# Altium PCB Brakelight_V2.PcbDoc
Units mm, origin at the board's own origin, x right, y up, seen from the top; angles counter-clockwise.
Board outline 30 x 50 mm, 2 copper layers (Top Layer, Bottom Layer); 30 components, 22 nets, 101 pads, 97 vias.
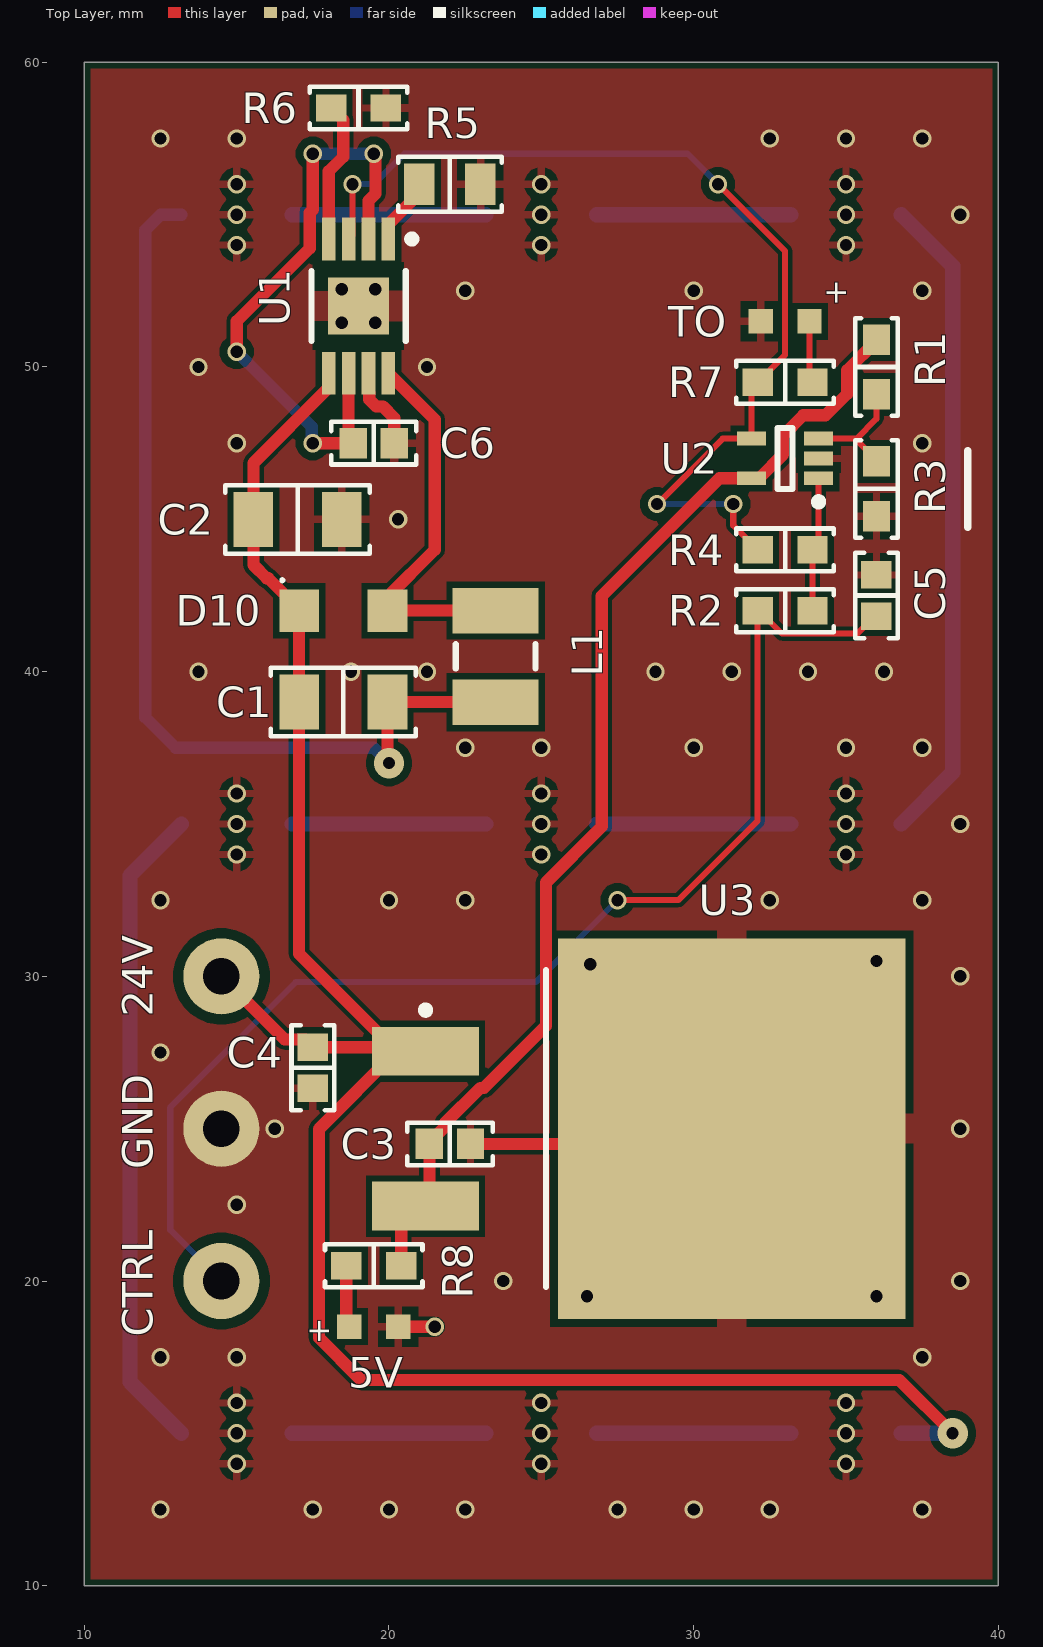
[diagram p0: Top Layer view]
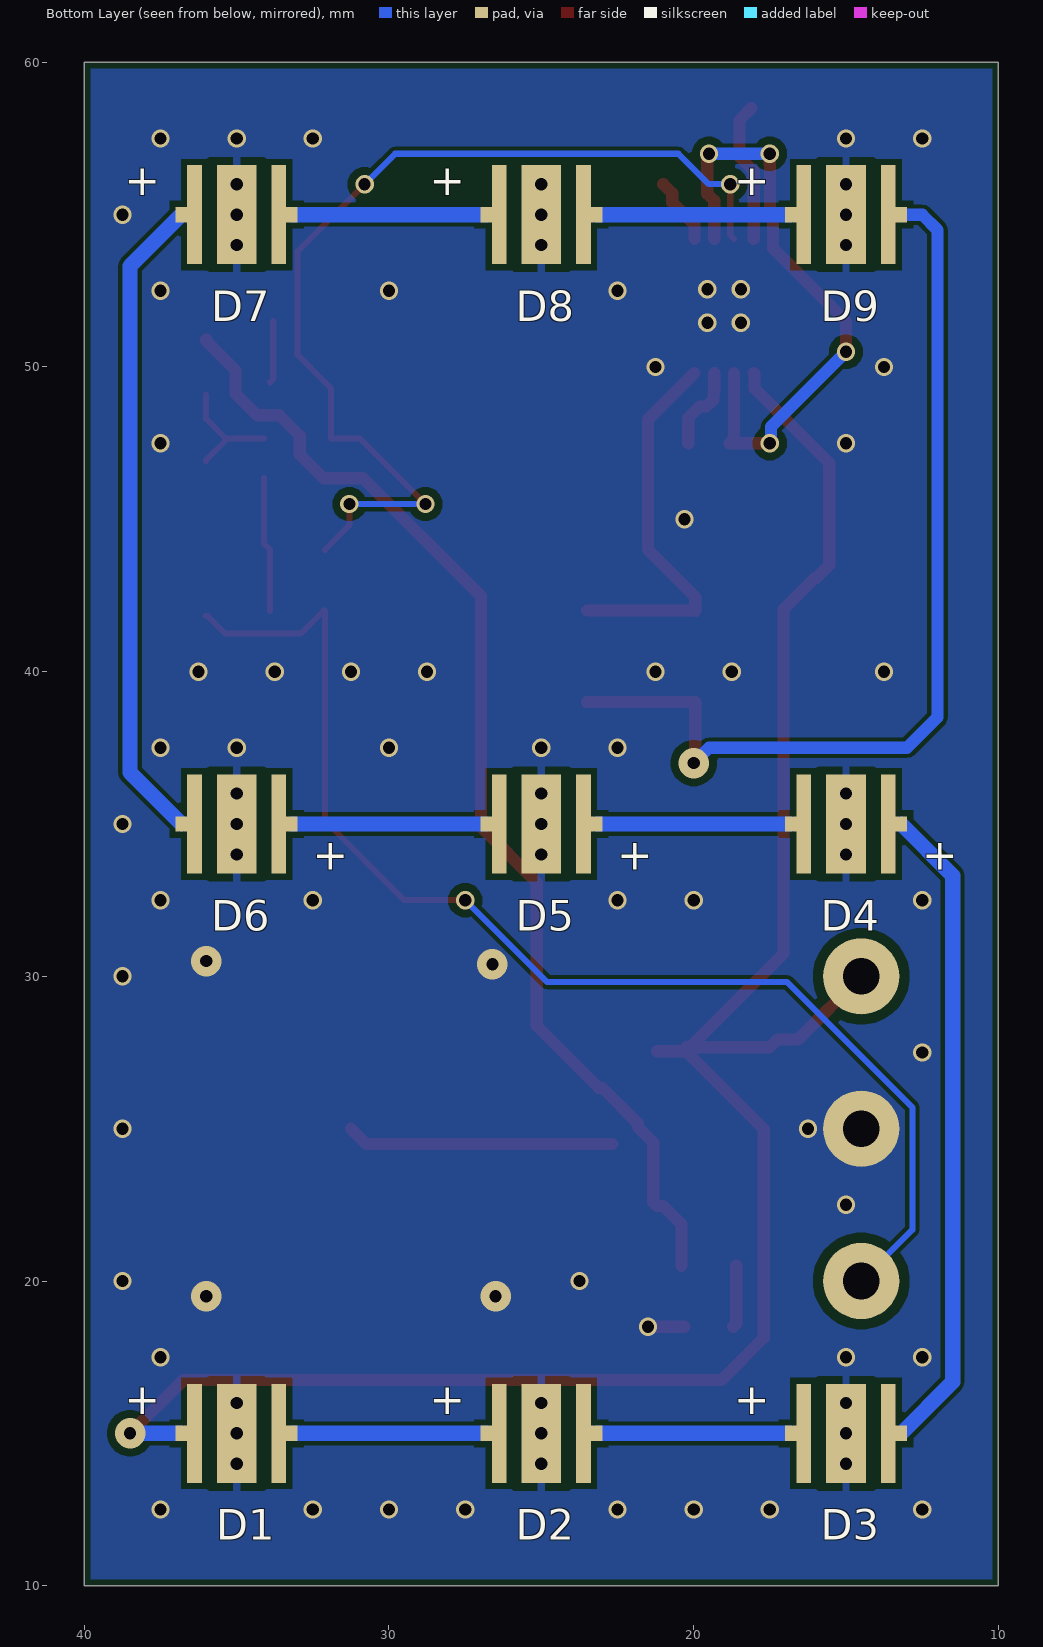
[diagram p1: Bottom Layer view, seen from below]
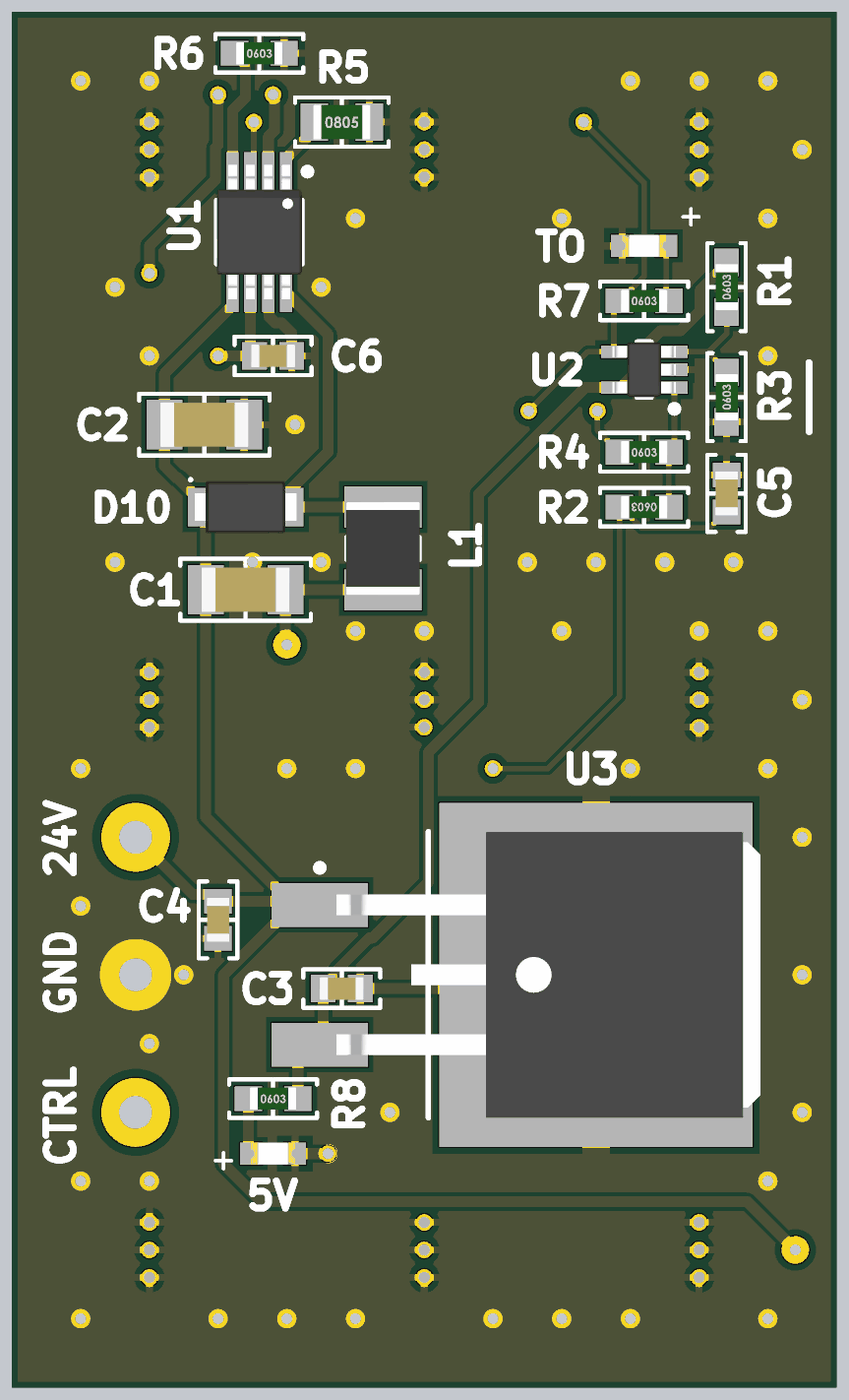
[diagram p2: 3D render of the assembled board from above, using the file's embedded part models]
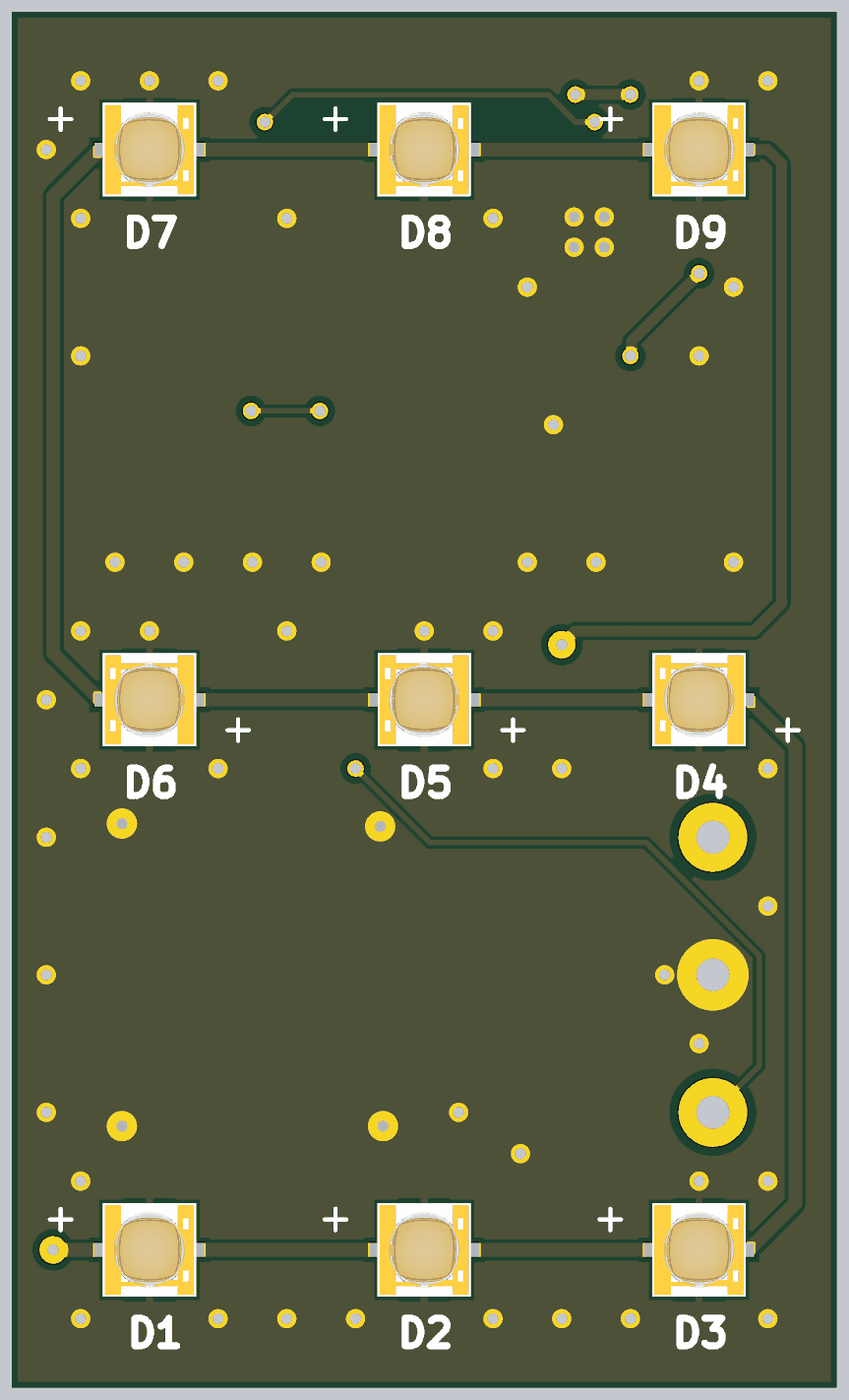
[diagram p3: 3D render of the assembled board from below, using the file's embedded part models]

## Layer stack, top to bottom
Top Solder: solder mask 0.0102, Solder Resist, Dk 3.5
Top Layer: signal copper 0.0356
Dielectric 1: dielectric 0.32, FR-4, Dk 4.8
Bottom Layer: signal copper 0.0356
Bottom Solder: solder mask 0.0102, Solder Resist, Dk 3.5

## Board outline
10,10 40,10 40,60 10,60

## Design rules (kind name [scope] priority, off if disabled: settings)
BoardOutlineClearance [All] p1: gap=0.2 ignorepadtopadclearanceinfootprint=FALSE // Trace to V-cut >0.4mm
Clearance [All] p1: gap=0.254 ignorepadtopadclearanceinfootprint=TRUE except(0: Arc-Hole Track-Hole SMDPad-Hole THPad-Hole Via-Hole Fill-Hole Poly-Hole Region-Hole Text-Hole; 0.127: Arc-Arc Arc-Track Arc-Fill Arc-Poly Arc-Region Track-Track Track-Fill Track-Poly Track-Region SMDPad-SMDPad; 0.15: Arc-Text Track-Text SMDPad-Text THPad-Text Via-Text Fill-Text Poly-Text Region-Text Text-Text; 0.2: Arc-SMDPad Track-SMDPad SMDPad-Fill SMDPad-Poly SMDPad-Region; 0.33: Arc-THPad Track-THPad THPad-Fill THPad-Poly THPad-Region; 0.5: SMDPad-THPad THPad-THPad THPad-Via)
DiffPairsRouting [All] p1: maxlimit=10 minlimit=0.254 mostfreqgap=0.254 toplayer_minwidth=0.127 toplayer_maxwidth=5 toplayer_prefwidth=0.254 bottomlayer_minwidth=0.127 bottomlayer_maxwidth=5 bottomlayer_prefwidth=0.254 maxuncoupledlength=12.7
HoleSize [All] p1: absolutevalues=TRUE maxlimit=6.3 minlimit=0.2 maxpercent=80.000 minpercent=20.000 // Finished hole size tolerance +0.13/-0.08mm
HoleToHoleClearance [All] p1: gap=0.5 allowstackedmicrovias=TRUE
MinimumAnnularRing [All] p1: minimumring=0.13 // 1oz Copper
PolygonConnect [All] p1: connectstyle=Relief reliefconductorwidth=0.254 reliefentries=4 polygonreliefangle="90 Angle" airgapwidth=0.254
RoutingVias [All] p1: holewidth=0.711 width=1.27 viastyle="Through Hole" minholewidth=0.3 minwidth=0.6 maxholewidth=0.711 maxwidth=1.27
SolderMaskExpansion [All] p1: expansion=0.05 istentingtop=FALSE
Width [All] p1: maxlimit=4.5 minlimit=0.127 preferedwidth=0.254 minimp=50.000000 maximp=50.000000 favimp=50.000000
27 further rules are at their usual default settings.

## Components (designator, comment, footprint, x,y, rotation, side; value= is the part's Value field where it differs from the comment)
5V "Green, 3.2V" WL-SMCW_0603_H=0.7mm 19.5,18.5 r180 top
C1 "SMD Capacitor 50V" "CAP 1206/3216" 18.5,39 r0 top value=4.7uF
C2 "SMD Capacitor 50V" "CAP 1206/3216" 17,45 r180 top value=4.7uF
C3 "SMD Capacitor 6.3V" "CAP 0603/1608" 22,24.5 r0 top value=100nF
C4 "SMD Capacitor 25V" "CAP 0603/1608" 17.5,27 r270 top value=1uF
C5 "SMD Capacitor 6.3V" "CAP 0603/1608" 36,42.5 r270 top value=2.2uF
C6 "SMD Capacitor 10V" "CAP 0603/1608" 19.5,47.5 r0 top value=1uF
D1 "Hyper Red, 2.2V" WL-SMDC_3535 35,15 r0 bottom
D2 "Hyper Red, 2.2V" WL-SMDC_3535 25,15 r0 bottom
D3 "Hyper Red, 2.2V" WL-SMDC_3535 15,15 r0 bottom
D4 "Hyper Red, 2.2V" WL-SMDC_3535 15,35 r180 bottom
D5 "Hyper Red, 2.2V" WL-SMDC_3535 25,35 r180 bottom
D6 "Hyper Red, 2.2V" WL-SMDC_3535 35,35 r180 bottom
D7 "Hyper Red, 2.2V" WL-SMDC_3535 35,55 r0 bottom
D8 "Hyper Red, 2.2V" WL-SMDC_3535 25,55 r0 bottom
D9 "Hyper Red, 2.2V" WL-SMDC_3535 15,55 r0 bottom
D10 "Shottky Diode" SODFL127P600-8N 18.5,42 r0 top
L1 "SMD Inductor" CHIP_1210_3225 23.5,40.5 r90 top value=22uH
R1 "SMD Resistor" "STACKPOLE CSR0603" 36,50 r90 top value=4kR
R2 "SMD Resistor" "STACKPOLE CSR0603" 33,42 r180 top value=10kR
R3 "SMD Resistor" "STACKPOLE CSR0603" 36,46 r90 top value=700R
R4 "SMD Resistor" "STACKPOLE CSR0603" 33,44 r0 top value=510kR
R5 "SMD Resistor 1/4W" "STACKPOLE CSR0805" 22,56 r0 top value=560mR
R6 "SMD Resistor" "STACKPOLE CSR0603" 19,58.5 r0 top value=40.2kR
R7 "SMD Resistor" "STACKPOLE CSR0603" 33,49.5 r0 top value=1k
R8 "SMD Resistor" "STACKPOLE CSR0603" 19.5,20.5 r0 top value=1k
TO "Red, 2V" WL-SMCW_0603_H=0.7mm 33,51.5 r0 top (schematic designator T_O)
U1 "Constant Current Source" TSOP65P490X110_HS-9M 19,52 r270 top
U2 "Rail-to-Rail OP-Amp" 5-Lead_SOT_SC-70 33,47 r180 top
U3 "L7805ABD2T-TR" DPAK254P1542X460-3M 28.5,25 r0 top

## Footprints (in the part's own frame and the unit in brackets; to place one, negate y for a bottom-side part, rotate by r counter-clockwise, add the part's x,y. Pads: shape width x height; smd on the part's side, far side on the other; paste and mask are expansions set on the pad)
5-Lead_SOT_SC-70 [mm] "SOT23, 5-Leads, Body 2,00x2,10mm, Pitch 0,65mm, IPC Medium Density"
  rect 0.95x0.45 smd: 1(-1.1,0.65) 2(-1.1,0) 3(-1.1,-0.65) 4(1.1,-0.65) 5(1.1,0.65)
  silkscreen extent -1.23,-1 0.25,1.55, body extent -1.15,-1 1.15,1, height 1.1
"CAP 0603/1608" [mm] "Chip Capacitor, 2-Leads, Body 1.60x0.80mm, IPC Medium Density"
  rect 0.9x1 smd: 1(-0.675,0) 2(0.675,0)
  silkscreen extent -1.4,-0.7 1.4,0.7, body extent -0.8,-0.41 0.8,0.41, height 0.82
"CAP 1206/3216" [mm] "Chip Capacitor, 2-Leads, Body 3.25x1.60mm, IPC Medium Density"
  rect 1.3x1.8 smd: 1(-1.45,0) 2(1.45,0)
  silkscreen extent -2.37,-1.12 2.37,1.12, body extent -1.6,-0.81 1.6,0.81, height 1.62
CHIP_1210_3225 [mm] "Chip Inductor, 2-Leads, Body 3,20x2,50mm, IPC Low Density"
  rect 1.49x2.82 smd: 1(-1.505,0) 2(1.505,0)
  silkscreen extent -0.4,-1.31 0.4,1.31, body extent -1.7,-1.35 1.7,1.35, height 2.7
DPAK254P1542X460-3M [mm] "D2-PAK, 3-Pads, Body 7,78x8,56mm (max), IPC Low Density"
  rect 3.5x1.6 smd: 1(-7.3,2.54) 3(-7.3,-2.54)
  rect 11.4x12.5 smd: 4(2.75,0)
  silkscreen extent -7.42,-5.2 -3.35,5.2, body extent -6.69,-5.2 8.73,5.2, height 4.63
SODFL127P600-8N [mm]
  rect 1.3x1.4 smd: 1C(-1.45,0) 2A(1.45,0)
  silkscreen extent -2.05,0.95 -1.95,1.05, body extent -1.85,-0.95 1.85,0.95, height 1.08
"STACKPOLE CSR0603" [mm] "Chip Resistor, 2-Leads, Body 1.60x0.80mm, IPC Medium Density"
  rect 1x0.9 smd: 1(-0.9,0) 2(0.9,0)
  silkscreen extent -1.6,-0.7 1.6,0.7, body extent -0.85,-0.4 0.85,0.4, height 0.45
"STACKPOLE CSR0805" [mm] "Chip Resistor, 2-Leads, Body 2.00x1.25mm, IPC Medium Density"
  rect 1x1.35 smd: 1(-1,0) 2(1,0)
  silkscreen extent -1.7,-0.9 1.7,0.9, body extent -1.05,-0.63 1.05,0.62, height 0.55
TSOP65P490X110_HS-9M [mm] "TSOP, 8-Leads, Body 3,00x3,00mm, Pitch 0,65mm, Thermal Pad 2,00x1,88mm, IPC Low Density"
  rect 1.4x0.45 smd: 1(-2.2,0.975) 2(-2.2,0.325) 3(-2.2,-0.325) 4(-2.2,-0.975) 5(2.2,-0.975) 6(2.2,-0.325) 7(2.2,0.325) 8(2.2,0.975)
  rect 1.88x2 smd: 7(0,0)
  silkscreen extent -2.32,-1.55 1.15,1.88, body extent -2.45,-1.55 2.45,1.55, height 1.1
WL-SMCW_0603_H=0.7mm [mm] "SMD Mono-color Chip LED, body 1.6x0.8mm"
  rect 0.8x0.8 smd: 1(-0.8,0) 2(0.8,0)
  body extent -0.8,-0.4 0.8,0.4, height 0.7
WL-SMDC_3535 [mm] "SMD Mono-color Ceramic LED Waterclear, body 3.4x3.4mm, 2-leads"
  rect 0.375x0.5 smd: 1(-1.813,0) 2(1.813,0)
  rect 0.48x3.25 smd: 1(-1.385,0) 2(1.385,0)
  rect 1.3x3.25 smd: "Thermal Pad"(0,0)
  body extent -1.7,-1.7 1.7,1.7, height 2.1

## Part data
5V: library part 150060GS75000, "WL-SMCW SMT Mono-color Chip LED Waterclear, size 0603, Green, 3.2V, 140deg", Emitting Color=Green, Forward Voltage typ.=3.2V, Operating Temperature="-40 to +85degC", Chip Technology=InGaN, ComponentLink1Description=Manufacturer, ComponentLink1URL=http://www.we-online.de, ComponentLink2Description=Datasheet, ComponentLink2URL=https://www.we-online.com/catalog/datasheet/150060GS75000.pdf, Dominant Wavelength typ.=525nm, Luminous Intensity typ.=430mcd, Mounting Technology=SMT, Packaging="Tape and Reel", Part Number=150060GS75000, Peak Wavelength typ.=515nm, Published Date="December 2019", Publisher="Wurth Elektronik", Size=0603, Viewing Angle=140deg
C1 C2 C3 C4 C5 C6: library part "SMD Capacitor", "Capacitor with multiple Footprints"
D1 D2 D3 D4 D5 D6 D7 D8 D9: library part 150353HS74500, "WL-SMDC Horticulture SMT Monocolor Ceramic LED Waterclear, size 3535, 2.2V, Hyper Red", Emitting Color="Hyper Red", Forward Voltage=2.2V, Manufacturer="Wurth Elektronik", Operating Temperature="-40 to +100degC", Chip Technology=AlInGaP, ComponentLink1Description=Manufacturer, ComponentLink1URL=http://www.we-online.de, ComponentLink2Description=Datasheet, ComponentLink2URL=https://katalog.we-online.de/led/datasheet/150353HS74500.pdf, Manufacturer Part Number=150353HS74500, Mounting Technology=SMT, Packaging="Tape and Reel", Peak Wavelength=660nm, Published Date="August 2020", Size=3535, Viewing Angle=125deg
D10: library part SS1FL4HM3/H, "Surface-Mount Schottky Barrier Rectifier / 40V, 1A", ComponentLink1Description=Octopart, ComponentLink1URL=https://octopart.com/ss1fl4hm3%2Fh-vishay-73870157?r=sp
L1: library part L1210R220MDWIT, "Ind Chip High Current Unshielded Wirewound 22uH 20% 100kHz Ferrite 780mA 1210 T/R", ComponentLink1Description=Octopart, ComponentLink1URL=https://octopart.com/l1210r220mdwit-kemet-8043287?r=sp
R1 R2 R3 R4 R6 R7 R8: "Resistor with multiple footprints"
R5: library part "SMD Resistor", "Resistor with multiple footprints"
TO: library part 150060RS75000, "WL-SMCW SMT Mono-color Chip LED Waterclear, size 0603, Red, 2V, 140deg", Emitting Color=Red, Forward Voltage typ.=2V, Operating Temperature="-40 to +85degC", Chip Technology=AlInGaP, ComponentLink1Description=Manufacturer, ComponentLink1URL=http://www.we-online.de, ComponentLink2Description=Datasheet, ComponentLink2URL=https://www.we-online.com/catalog/datasheet/150060RS75000.pdf, Dominant Wavelength typ.=625nm, Luminous Intensity typ.=250mcd, Mounting Technology=SMT, Packaging="Tape and Reel", Part Number=150060RS75000, Peak Wavelength typ.=630nm, Published Date="December 2019", Publisher="Wurth Elektronik", Size=0603, Viewing Angle=140deg
U1: library part LM3407MYX/NOPB, "LM3407 350-mA, Constant Current Output Floating Buck Switching Converter / for High-Power LEDs", ComponentLink1Description=Octopart, ComponentLink1URL=https://octopart.com/lm3407myx%2Fnopb-texas+instruments-24846104?r=sp
U2: library part MCP6231UT-E/LT, "MCP6231 Series 6 V 300 kHz Rail-to-Rail I/O Operational Amplifier - SC-70-5", ComponentLink1Description=Octopart, ComponentLink1URL=https://octopart.com/mcp6231ut-e%2Flt-microchip-419329?r=sp
U3: "Linear Voltage Regulators 5.0V 1.5A Positive"

## Free pads (board coordinates)
  round 2.5 hole 1.2: 5(14.5,20) 6(14.5,25) 7(14.5,30)

## Via types
v1: diameter 0.6, hole 0.4, Top Layer to Bottom Layer, 91 vias
v2: diameter 1, hole 0.4, Top Layer to Bottom Layer, 6 vias

## Nets (pads, with @x,y where several pads share a name; then routed paths per layer and width w, separated by ;. In a path a pad name is that pad's centre, name@x,y a point inside that pad or via, vN(x,y) a via of type N, cw(c..) or ccw(c..) an arc to the next point about the centre after c; other vN are vias at no path point)
5V: C3.1 R1.2 R8.2 U2.5 U3.3 | length 38.2
  Top Layer w0.4: R8.2 20.4,21.86 21,22.46 U3.3 21.325,22.585 21.325,24.55 21.825,25.05 21.825,25.166 22.999,26.34 23.116,26.34 25.15,28.374 25.15,33.084 26.983,34.917 26.983,42.483 30.85,46.35 32.15,46.35 32.93,47.13 32.93,47.745 33.599,48.415 34.331,48.415 35.04,49.125 35.04,49.89 36,50.85 R1.2
BPS_In: C5.2 pad.5 R2.2 | length 40.9
  Top Layer w0.2: v1(27.5,32.5) 29.5,32.5 32.1,35.1 R2.2 32.15,42 32.9,41.25 35.375,41.25 35.95,41.825 C5.2
  Bottom Layer w0.2: pad.5 12.82,21.68 12.82,25.696 16.934,29.81 24.81,29.81 v1(27.5,32.5)
GND: 5V.1 "D1.Thermal Pad" "D2.Thermal Pad" "D3.Thermal Pad" "D4.Thermal Pad" "D5.Thermal Pad" "D6.Thermal Pad" "D7.Thermal Pad" "D8.Thermal Pad" "D9.Thermal Pad" C2.1 C3.2 C4.2 C5.1 C6.2 pad.6 R3.1 R5.2 R6.2 TO.1 U1.7 U2.2 U3.4 | length 12.8
  Top Layer w0.4: U1.7@19.325,49.8 19.325,49.175 19.35,49.15 19.35,48.934 19.584,48.7 19.8,48.7 20.175,48.325 C6.2 ; 5V.1 v1(21.5,18.5) ; C3.2 30.75,24.5 U3.4
  other v1: 12.5,12.5 17.5,12.5 20,12.5 22.5,12.5 27.5,12.5 30,12.5 32.5,12.5 37.5,12.5 15,14 25,14 35,14 15,15 25,15 35,15 15,16 25,16 35,16 12.5,17.5 15,17.5 37.5,17.5 23.75,20 38.75,20 15,22.5 16.25,25 38.75,25 12.5,27.5 38.75,30 12.5,32.5 20,32.5 22.5,32.5 32.5,32.5 37.5,32.5 15,34 25,34 35,34 15,35 25,35 35,35 38.75,35 15,36 25,36 35,36 22.5,37.5 25,37.5 30,37.5 35,37.5 37.5,37.5 13.75,40 18.75,40 21.25,40 28.75,40 31.25,40 33.75,40 36.25,40 20.3,45 15,47.5 37.5,47.5 13.75,50 21.25,50 18.45,51.45 19.55,51.45 22.5,52.5 30,52.5 37.5,52.5 18.45,52.55 19.55,52.55 15,54 25,54 35,54 15,55 25,55 35,55 38.75,55 15,56 25,56 35,56 12.5,57.5 15,57.5 32.5,57.5 35,57.5 37.5,57.5
  other v2: 26.5,19.5 36,19.5 26.604,30.396 36,30.5
LED_In: C1.1 C2.2 C4.1 D1.2 D10.1C pad.7 U1.5 U3.1 | length 67.2
  Top Layer w0.4: pad.7 16.575,27.925 17.25,27.925 C4.1 U3.1@20.25,27.675 ; U1.5 18,49.775 18,49.3 15.55,46.85 15.55,43.5 15.984,43.066 16.034,43.066 17.05,42.05 17.05,30.74 U3.1@20.25,27.54 ; U3.1 U3.1@20.25,27.54 ; v2(38.5,15) 36.746,16.754 19.08,16.754 17.7,18.134 17.7,24.99 U3.1@20.25,27.54
  Bottom Layer w0.5: D1.2@36.813,15 v2(38.5,15)
LED_Out: C1.2 D9.1 L1.1 | length 31.6
  Top Layer w0.4: v2(20,37) 19.95,37.05 C1.2 23.495,39 L1.1
  Bottom Layer w0.4: D9.1@13.187,55 12.5,55 12,54.5 12,38.5 13,37.5 19.5,37.5 v2(20,37)
Net5V_2: 5V.2 R8.1 | length 2
  Top Layer w0.4: R8.1 18.6,18.6 5V.2
NetC6_1: C6.1 U1.2 U1.6 | length 20.2
  Top Layer w0.4: v1(15,50.5) 15,51.5 17.4,53.9 17.4,55.066 17.498,55.164 17.498,56.643 17.5,56.645 v1(17.5,57) ; v1(17.5,47.5) C6.1 18.675,47.65 U1.6 ; U1.2 19.325,55.459 19.554,55.688 19.554,56.892 19.5,56.946 v1(19.5,57)
  Bottom Layer w0.4: v1(15,50.5) 17.462,48.038 17.462,47.538 v1(17.5,47.5) ; v1(17.5,57) v1(19.5,57)
NetD1_1: D1.1 D2.2 | length 6.4
  Bottom Layer w0.5: D2.2@26.813,15 D1.1@33.188,15
NetD2_1: D2.1 D3.2 | length 6.4
  Bottom Layer w0.5: D3.2@16.813,15 D2.1@23.187,15
NetD3_1: D3.1 D4.2 | length 21.4
  Bottom Layer w0.5: D3.1@13.187,15 11.5,16.688 11.5,33.313 D4.2@13.187,35
NetD4_1: D4.1 D5.2 | length 6.4
  Bottom Layer w0.5: D4.1@16.813,35 D5.2@23.187,35
NetD5_1: D5.1 D6.2 | length 6.4
  Bottom Layer w0.5: D5.1@26.813,35 D6.2@33.188,35
NetD6_1: D6.1 D7.2 | length 21.4
  Bottom Layer w0.5: D6.1@36.813,35 38.5,36.687 38.5,53.313 D7.2@36.813,55
NetD7_1: D7.1 D8.2 | length 6.4
  Bottom Layer w0.5: D8.2@26.813,55 D7.1@33.188,55
NetD8_1: D8.1 D9.2 | length 6.4
  Bottom Layer w0.5: D9.2@16.813,55 D8.1@23.187,55
NetD10_2A: D10.2A L1.2 U1.8 | length 12.6
  Top Layer w0.4: U1.8 21.5,48.275 21.5,44 19.95,42.45 D10.2A 19.955,42.005 L1.2
NetR1_1: R1.1 R3.2 U2.3 | length 4
  Top Layer w0.2: U2.3 35.35,47.65 ; R3.2 36,46.95 35.35,47.6 35.35,47.65 ; R1.1 36,48.3 35.35,47.65
NetR2_1: R2.1 R4.2 U2.1 | length 4.4
  Top Layer w0.2: R2.1 R4.2 34.1,44.2 U2.1
NetR5_1: R5.1 U1.1 | length 2.2
  Top Layer w0.4: U1.1 19.975,54.675 20.7,55.4 20.7,55.7 R5.1
NetR6_1: R6.1 U1.4 | length 4.7
  Top Layer w0.4: U1.4 18.025,56.425 18.5,56.9 18.5,58.1 R6.1
NetR7_2: R7.2 TO.2 | length 2
  Top Layer w0.2: TO.2 33.8,49.6 R7.2
Trigger_Out: R4.1 R7.1 U1.3 U2.4 | length 32.7
  Top Layer w0.2: U1.3 18.8,54.325 v1(18.8,56) ; v1(28.8,45.5) 30.95,47.65 U2.4 31.9,49.3 R7.1 33,50.4 33,53.8 v1(30.8,56) ; v1(31.3,45.5) 31.3,44.8 R4.1
  Bottom Layer w0.2: v1(18.8,56) 19.5,56 20.5,57 29.8,57 v1(30.8,56) ; v1(28.8,45.5) v1(31.3,45.5)

## Polygon pours and split planes (outlines as drawn)
GND on Top Layer "GND_L01_P004" (solid, remove dead copper, pour order 4): 10,60 40,60 40,10 10,10
GND on Top Layer "GND_L01_P003" (solid, remove dead copper, pour order 3): 17.5,50.5 23.5,50.5 23.5,59 19,59 19,58 22,58 22,53.5 17.5,53.5
GND on Top Layer "GND_L01_P001" (solid, remove dead copper, pour order 1): 19.5,48 19.5,46.5 17,46.5 17,43.5 20,43.5 21,44.5 21,48
GND on Bottom Layer "GND_L02_P000" (solid, remove dead copper, pour order 0): 10,60 40,60 40,10 10,10

## Silkscreen, mask and mechanical layers (free items; w line width, h text height)
Top Overlay:
  lines w0.254: 39,44.75 39,47.25
  text "24V" at 12.25,28.667 h1 r90
  text "GND" at 12.25,23.667 h1 r90
  text "CTRL" at 12.25,18.167 h1 r90
Boardoutline:
  the board outline again, w0.2

## Text inside footprints (layer, text, board x,y; h text height)
5V: Top Overlay "+" at 17.4,18.8 h0.76 r270
D1: Bottom Overlay "+" at 37.5,16.5 h1.02 r180
D2: Bottom Overlay "+" at 27.5,16.5 h1.02 r180
D3: Bottom Overlay "+" at 17.5,16.5 h1.02 r180
D4: Bottom Overlay "+" at 12.5,33.5 h1.02
D5: Bottom Overlay "+" at 22.5,33.5 h1.02
D6: Bottom Overlay "+" at 32.5,33.5 h1.02
D7: Bottom Overlay "+" at 37.5,56.5 h1.02 r180
D8: Bottom Overlay "+" at 27.5,56.5 h1.02 r180
D9: Bottom Overlay "+" at 17.5,56.5 h1.02 r180
TO: Top Overlay "+" at 35,52 h0.76 r90